# EAGLE board nixie_test_v1 (EAGLE 6.1)
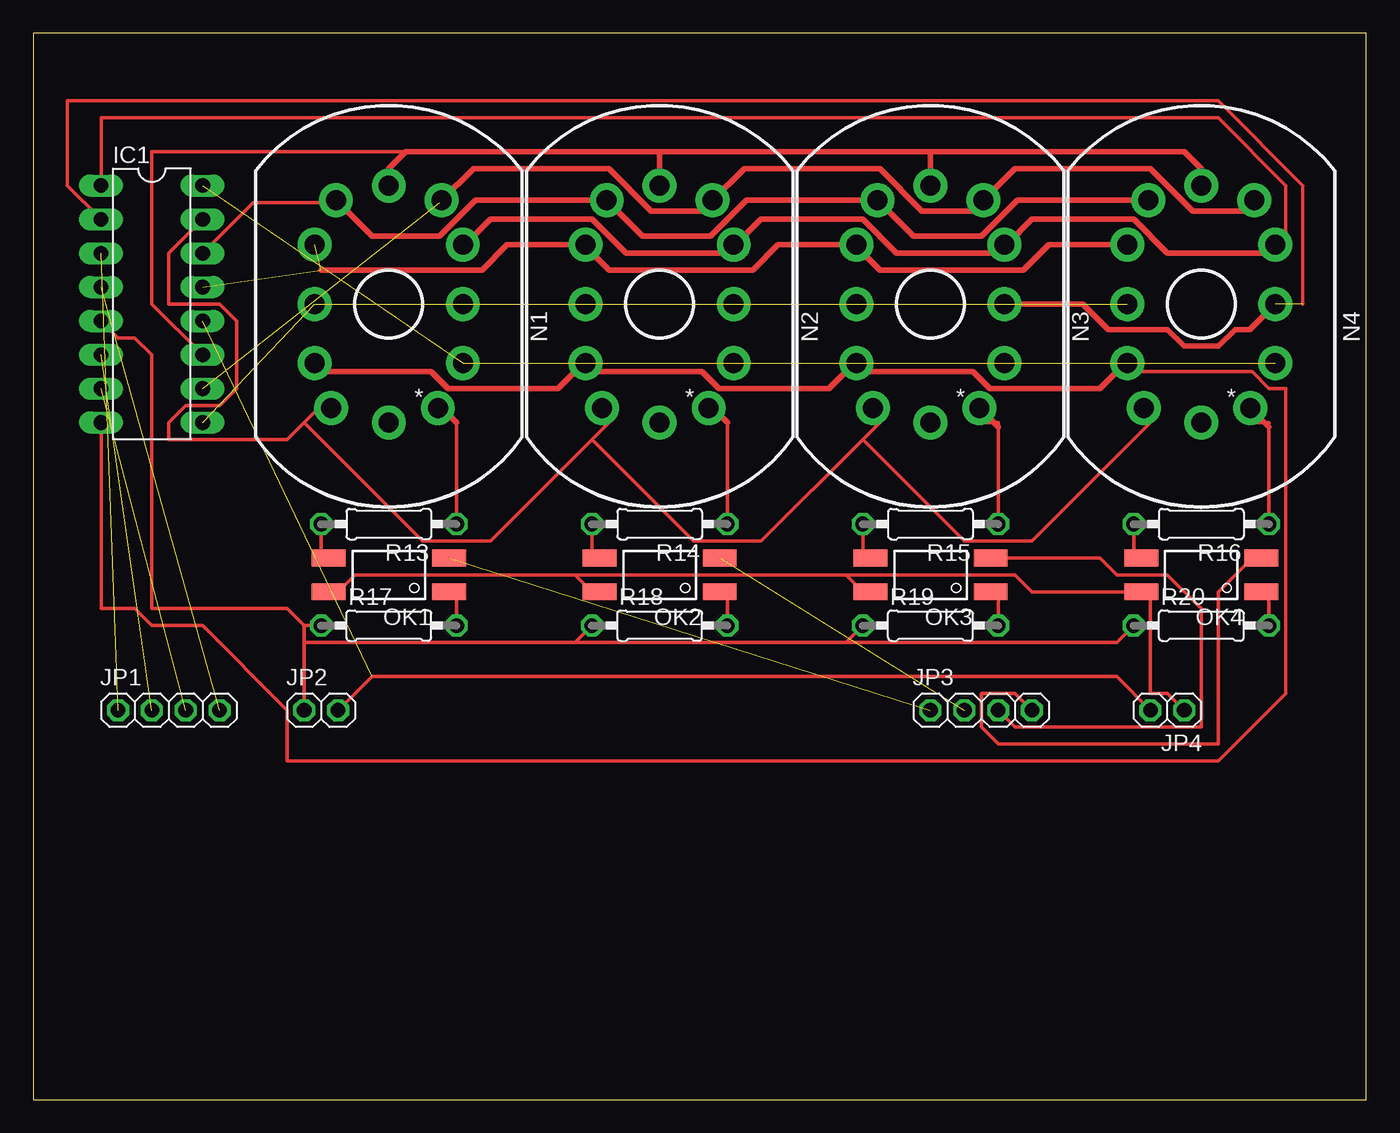
[diagram p0: board, top side]

Size 100 x 80 mm. Coordinates in mm from the lower left corner, seen from the top.
Outline: 0,0 100,0 100,80 0,80 0,0
Copper layers (1*16): Top 0.035mm / dielectric 1.5mm / Bottom 0.035mm
Design rules: minimum track width 10mil, minimum drill 24mil, track to track 8mil, track to pad 8mil, pad to pad 8mil, via to via 8mil, smd to smd 8mil, copper to edge 40mil, drill to drill 8mil, minimum pad ring 10mil, minimum via ring 8mil, stop-mask expansion 4mil, vias tented up to drill 0mil, thermal gap 10mil

## Footprints (pad centres in the part's own frame; a part is rotated, then mirrored left to right if it is on the bottom)
DIL16 = drill 1.1 long: 1 -8.89,-3.81; 2 -6.35,-3.81; 3 -3.81,-3.81; 4 -1.27,-3.81; 5 1.27,-3.81; 6 3.81,-3.81; 7 6.35,-3.81; 8 8.89,-3.81; 9 8.89,3.81; 10 6.35,3.81; 11 3.81,3.81; 12 1.27,3.81; 13 -1.27,3.81; 14 -3.81,3.81; 15 -6.35,3.81; 16 -8.89,3.81
1X04 = drill 1.1 octagon: 1 -3.81,0; 2 -1.27,0; 3 1.27,0; 4 3.81,0
1X02 = drill 1.1 octagon: 1 -1.27,0; 2 1.27,0
IN-12 = drill 1.5 pad 2.54: 0 5.556,-4.445; 1 -4.317,-7.817; 2 -5.556,-4.445; 3 -5.556,0; 4 -5.556,4.445; 5 -3.969,7.779; 6 0,8.89; 7 3.969,7.779; 8 5.556,4.445; 9 5.556,0; A 3.683,-7.817; LHDP 0,-8.89 | hole 5: 0,0
4-SMD = smd 2.54 x 1.27: 1 -4.51,1.27; 2 -4.51,-1.27; 3 4.51,-1.27; 4 4.51,1.27
0207/10 = drill 1.1 octagon: 1 -5.08,0; 2 5.08,0

## Placement (x,y rotation side)
IC1  74141N  [DIL16]  8.89,59.69 270 top
JP1  [1X04]  10.16,29.21 0 top
JP2  [1X02]  21.59,29.21 0 top
JP3  [1X04]  71.12,29.21 0 top
JP4  [1X02]  85.09,29.21 180 top
N1  IN-12B  [IN-12]  26.67,59.69 0 top
N2  IN-12B  [IN-12]  46.99,59.69 0 top
N3  IN-12B  [IN-12]  67.31,59.69 0 top
N4  IN-12B  [IN-12]  87.63,59.69 0 top
OK1  TLP627  [4-SMD]  26.67,39.37 180 top
OK2  TLP627  [4-SMD]  46.99,39.37 180 top
OK3  TLP627  [4-SMD]  67.31,39.37 180 top
OK4  TLP627  [4-SMD]  87.63,39.37 180 top
R13  [0207/10]  26.67,43.18 180 top
R14  [0207/10]  46.99,43.18 180 top
R15  [0207/10]  67.31,43.18 180 top
R16  [0207/10]  87.63,43.18 180 top
R17  [0207/10]  26.67,35.56 0 top
R18  [0207/10]  46.99,35.56 0 top
R19  [0207/10]  67.31,35.56 0 top
R20  [0207/10]  87.63,35.56 0 top

## Library data of the parts
IC1 JP1-JP4 N1-N4 R13-R20 = nixie_tube
OK1-OK4 = nixie_tube; OC_FARNELL: unknown; OC_NEWARK: unknown

## Nets
+5V: IC1.5 JP2.1 R17.1 R18.1 R19.1 R20.1
+24V: JP4.1 OK1.4 OK2.4 OK3.4 OK4.4
A1: JP3.1 OK1.2
A2: JP3.2 OK2.2
A3: JP3.3 OK3.2
A4: JP3.4 OK4.2
C0: IC1.16 N1.0 N2.0 N3.0 N4.0
C1: IC1.15 N1.1 N2.1 N3.1 N4.1
C2: IC1.8 N1.2 N2.2 N3.2 N4.2
C3: IC1.9 N1.3 N2.3 N3.3 N4.3
C4: IC1.13 N1.4 N2.4 N3.4 N4.4
C5: IC1.14 N1.5 N2.5 N3.5 N4.5
C6: IC1.11 N1.6 N2.6 N3.6 N4.6
C7: IC1.10 N1.7 N2.7 N3.7 N4.7
C8: IC1.1 N1.8 N2.8 N3.8 N4.8
C9: IC1.2 N1.9 N2.9 N3.9 N4.9
GND: IC1.12 JP2.2 JP4.2
N$1: IC1.3 JP1.1
N$2: IC1.6 JP1.2
N$3: IC1.7 JP1.3
N$4: IC1.4 JP1.4
N$13: N1.A R13.1
N$14: OK1.3 R13.2
N$15: N2.A R14.1
N$16: OK2.3 R14.2
N$17: N3.A R15.1
N$18: OK3.3 R15.2
N$19: N4.A R16.1
N$20: OK4.3 R16.2
N$21: OK1.1 R17.2
N$22: OK2.1 R18.2
N$23: OK3.1 R19.2
N$24: OK4.1 R20.2

## Tracks (layer width: path | path; a pad name or v marks a point on that pad's centre or on a via)
+5V
  Top 0.254: 20.32,35.56 20.32,34.29 | 20.32,34.29 JP2.1 | R17.1 20.32,35.56 | IC1.5 6.35,57.15 7.62,57.15 8.89,55.88 8.89,36.83 19.05,36.83 20.32,35.56 | 40.64,34.29 R18.1 | 20.32,34.29 40.64,34.29 | 60.96,34.29 R19.1 | 40.64,34.29 60.96,34.29 | R20.1 81.28,34.29 60.96,34.29
+24V
  Top 0.254: JP4.1 85.09,30.48 83.82,30.48 83.82,38.1 OK4.4 74.93,38.1 73.66,39.37 60.96,39.37 | 40.64,39.37 24.13,39.37 22.86,38.1 OK1.4 | 40.64,39.37 41.91,38.1 OK2.4 | 60.96,39.37 62.23,38.1 OK3.4 | 40.64,39.37 60.96,39.37
A1  (1 unrouted)
A2  (1 unrouted)
A3
  Top 0.254: OK3.2 80.01,40.64 81.28,39.37 85.09,39.37 87.63,36.83 87.63,27.94 73.66,27.94 JP3.3
A4
  Top 0.254: JP3.4 73.66,30.48 71.12,30.48 71.12,27.94 72.39,26.67 88.9,26.67 88.9,38.1 91.44,40.64 OK4.2
C0  (4 unrouted)
C1
  Top 0.254: IC1.15 10.16,63.5 10.16,59.69 13.97,59.69 15.24,58.42 15.24,53.34 13.97,52.07 11.43,52.07 10.16,50.8 10.16,49.53 19.05,49.53 20.32,50.8 | 20.32,50.8 21.59,52.07 N1.1 | 41.91,49.53 34.29,41.91 29.21,41.91 20.32,50.8 | 41.91,49.53 43.18,50.8 N2.1 | 62.23,49.53 54.61,41.91 49.53,41.91 41.91,49.53 | 62.23,49.53 63.5,50.8 N3.1 | 62.23,49.53 69.85,41.91 74.93,41.91 83.82,50.8 N4.1
C2
  Top 0.254: 20.32,54.61 N1.2 21.59,54.61 | IC1.8 5.08,36.83 7.62,36.83 8.89,35.56 12.7,35.56 19.05,29.21 19.05,25.4 88.9,25.4 93.98,30.48 93.98,53.34 92.71,53.34 91.44,54.61 82.55,54.61 N4.2
  Top 0.406: N4.2 81.92,55.24 80.01,53.34 71.75,53.34 70.48,54.61 62.23,54.61 61.59,55.24 | 61.59,55.24 59.69,53.34 51.44,53.34 50.16,54.61 42.07,54.61 N2.2 40.8,54.61 40.64,54.61 39.37,53.34 31.11,53.34 29.84,54.61 21.59,54.61 20.95,55.24 | N3.2 61.59,55.24
C3  (4 unrouted)
C4  (2 unrouted)
  Top 0.406: N4.4 76.2,64.14 74.3,62.23 63.5,62.23 61.59,64.14 | 61.59,64.14 55.88,64.14 53.98,62.23 43.18,62.23 41.27,64.14 | 41.27,64.14 35.56,64.14 33.66,62.23 21.59,62.23 | 41.27,64.14 N2.4 | 61.59,64.14 N3.4
C5
  Top 0.254: IC1.14 16.51,67.31 21.59,67.31 N1.5
  Top 0.406: N4.5 73.82,67.47 71.12,64.77 66.04,64.77 N3.5 53.5,67.47 50.8,64.77 45.72,64.77 N2.5 33.18,67.47 30.48,64.77 25.4,64.77 N1.5
C6
  Top 0.254: IC1.11 8.89,59.69 8.89,71.12 27.94,71.12
  Top 0.406: N1.6 26.67,69.85 27.94,71.12 46.99,71.12 | N2.6 46.99,71.12 | 46.99,71.12 67.31,71.12 | 67.31,71.12 86.36,71.12 87.63,69.85 N4.6 | N3.6 67.31,71.12
C7  (1 unrouted)
  Top 0.406: 30.48,67.31 N1.7 33.02,69.85 43.18,69.85 46.35,66.67 50.16,66.67 N2.7 53.34,69.85 63.5,69.85 66.67,66.67 70.48,66.67 N3.7 73.66,69.85 83.82,69.85 87,66.67 90.81,66.67 N4.7
C8
  Top 0.254: IC1.1 5.08,73.66 88.9,73.66 93.98,68.58 93.98,64.77 N4.8
  Top 0.406: N4.8 92.71,64.14 92.08,63.5 85.09,63.5 82.55,66.04 74.93,66.04 73.03,64.14 | 52.07,63.5 54.61,66.04 62.23,66.04 64.77,63.5 72.39,63.5 73.03,64.14 | 52.07,63.5 44.45,63.5 41.91,66.04 34.29,66.04 32.38,64.14 N1.8 32.23,63.98 | 73.03,64.14 N3.8 | 52.07,63.5 52.07,63.66 N2.8
C9  (3 unrouted)
  Top 0.254: IC1.2 2.54,68.58 2.54,74.93 88.9,74.93 95.25,68.58 95.25,59.69
  Top 0.406: N3.9 78.74,59.69 80.64,57.78 85.09,57.78 86.36,56.52 88.9,56.52 90.17,57.78 91.28,57.78 N4.9
GND  (1 unrouted)
  Top 0.254: JP2.2 25.4,31.75 81.28,31.75 JP4.2
N$1  (1 unrouted)
N$2  (1 unrouted)
N$3  (1 unrouted)
N$4  (1 unrouted)
N$13
  Top 0.254: 31.75,50.8 R13.1
  Top 0.406: 31.75,50.8 30.48,52.07 30.35,51.94 N1.A
N$14
  Top 0.254: R13.2 21.59,40.64 OK1.3
N$15
  Top 0.254: 52.07,50.8 R14.1
  Top 0.406: 52.07,50.8 50.8,52.07 50.67,51.94 N2.A
N$16
  Top 0.254: R14.2 41.91,40.64 OK2.3
N$17
  Top 0.254: R15.1 72.39,50.8 71.12,50.8 N3.A
  Top 0.406: 72.39,50.48 N3.A
N$18
  Top 0.254: R15.2 62.23,40.64 OK3.3
N$19
  Top 0.254: R16.1 92.71,50.8 91.44,50.8 N4.A
  Top 0.406: 92.71,50.48 N4.A
N$20
  Top 0.254: R16.2 82.55,40.64 OK4.3
N$21
  Top 0.254: R17.2 31.75,38.1 OK1.1
N$22
  Top 0.254: R18.2 52.07,38.1 OK2.1
N$23
  Top 0.254: R19.2 72.39,38.1 OK3.1
N$24
  Top 0.254: R20.2 92.71,38.1 OK4.1